# Altium PCB power_pcb.PcbDoc
Units mil, origin at the board's own origin, x right, y up, seen from the top; angles counter-clockwise.
Board outline 6000 x 4000 mil, 2 copper layers (Top Layer, Bottom Layer); 63 components, 42 nets, 184 pads, 0 vias.
Unrouted connection lines stored in the file: 132.
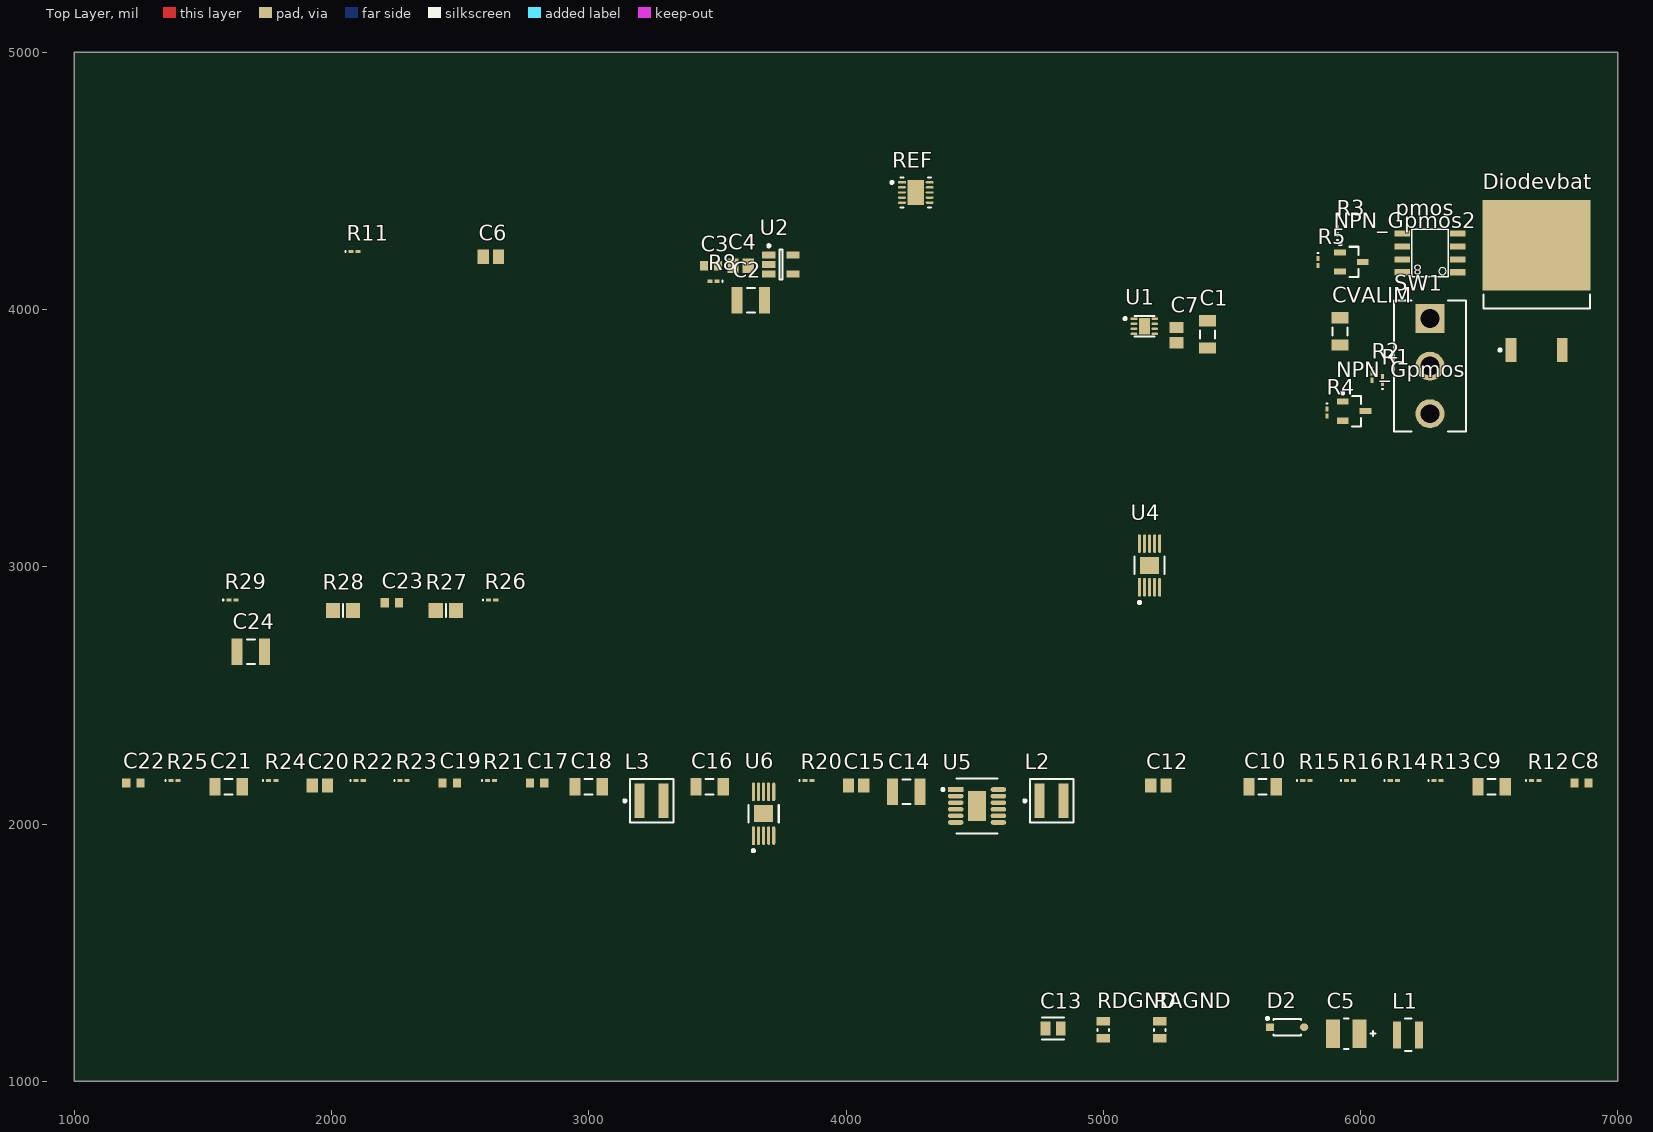
[diagram p0: Top Layer view]
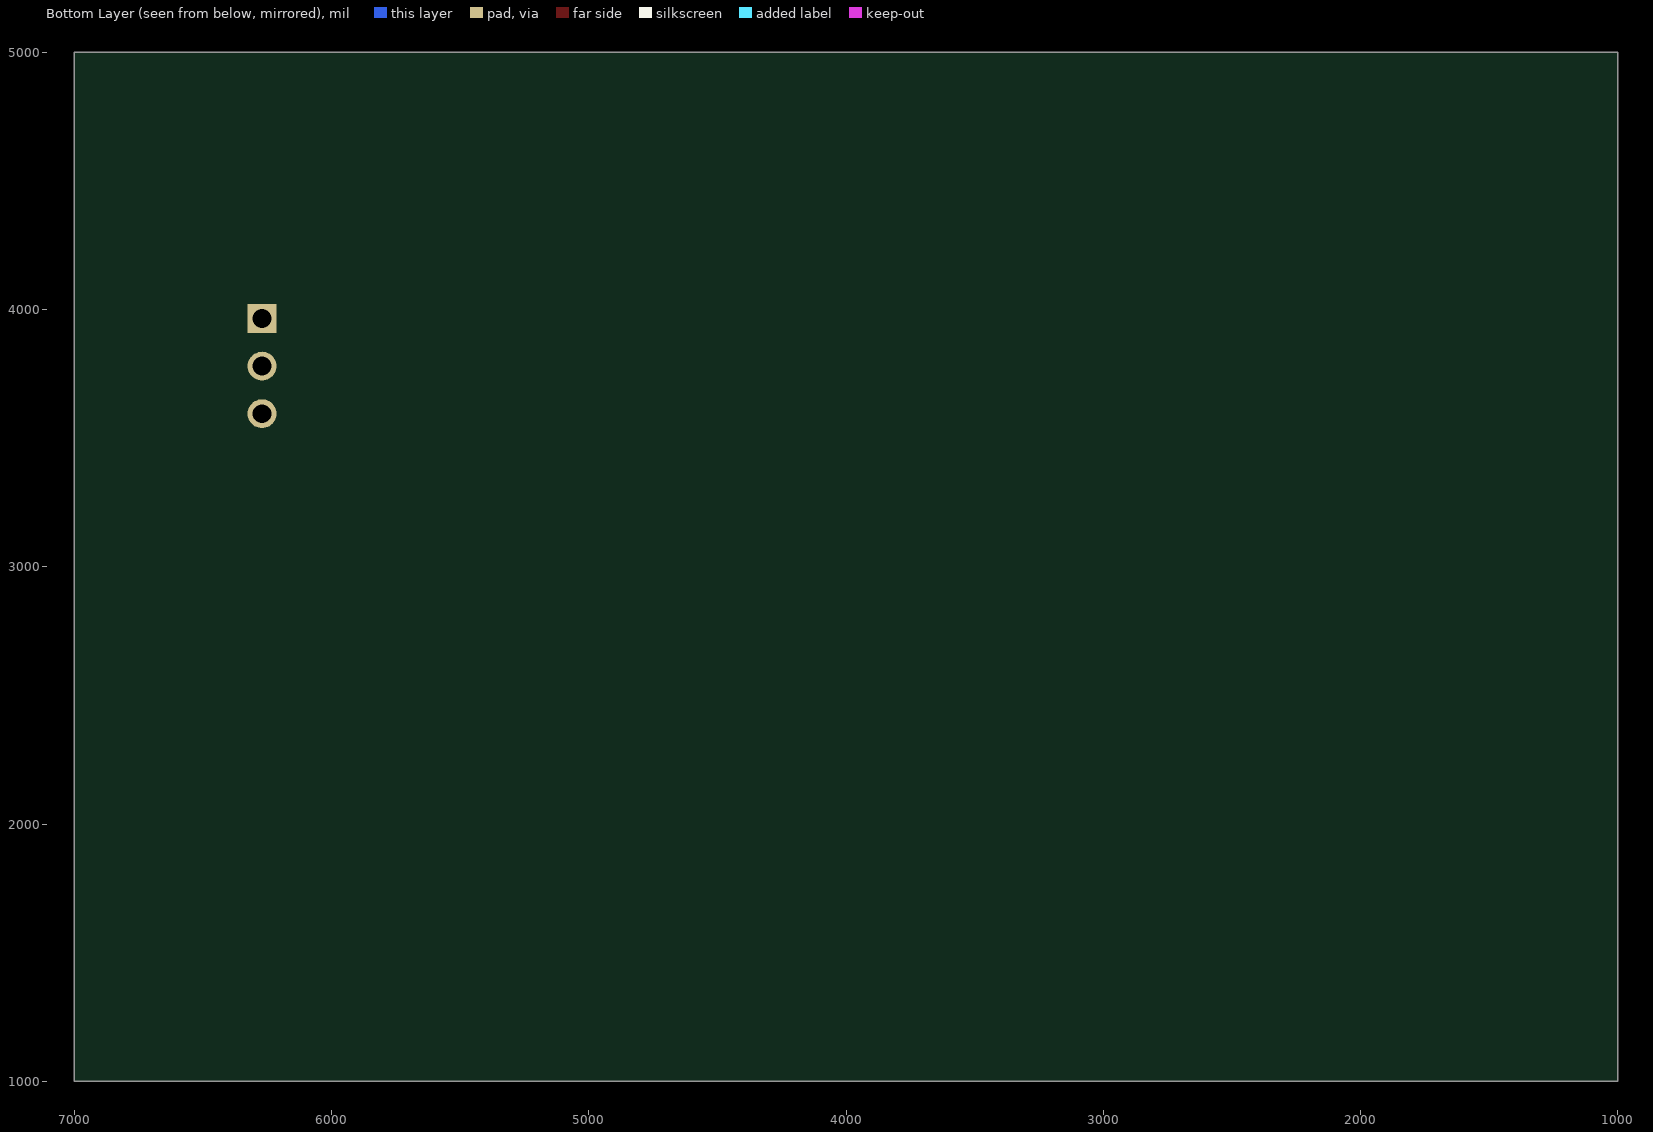
[diagram p1: Bottom Layer view, seen from below]

## Layer stack, top to bottom
Top Solder: solder mask 0.4, Solder Resist, Dk 3.5
Top Layer: signal copper 1.4
Dielectric 1: dielectric 12.6, FR-4, Dk 4.8
Bottom Layer: signal copper 1.4
Bottom Solder: solder mask 0.4, Solder Resist, Dk 3.5

## Board outline
1000,1000 7000,1000 7000,5000 1000,5000

## Design rules (kind name [scope] priority, off if disabled: settings)
Clearance [All] p1: gap=10 ignorepadtopadclearanceinfootprint=FALSE except(0: Arc-Hole Track-Hole SMDPad-Hole THPad-Hole Via-Hole Fill-Hole Poly-Hole Region-Hole Text-Hole)
PolygonConnect [All] p1: connectstyle=Relief reliefconductorwidth=10 reliefentries=4 polygonreliefangle="90 Angle" airgapwidth=10
RoutingVias [All] p1: holewidth=28 width=50 viastyle="Through Hole" minholewidth=28 minwidth=50 maxholewidth=28 maxwidth=50
SolderMaskExpansion [All] p1: expansion=4 istentingtop=FALSE
Width [All] p1: maxlimit=50 minlimit=5 preferedwidth=10 minimp=50.000000 maximp=50.000000 favimp=50.000000
30 further rules are at their usual default settings.

## Components (designator, comment, footprint, x,y, rotation, side; value= is the part's Value field where it differs from the comment)
C1 "X7R/25V" C1206 5405,3903.15 r270 top value=4.7µF
C2 "X5R/16V" C1210 3630.06,4036.04 r0 top value=22µF
C3 "X7R/10V" 1608[0603] 3475,4170 r0 top value=10nF
C4 "X7R/25V" C0805 3590.47,4170 r0 top value=1µF
C5 "TAJB226K016RNJ" FP-TAJB-MFG 5945,1185 r0 top
C6 "X7R" C0805 2619.5,4205 r0 top value=1µF
C7 "X7R/25V" C0805 5285,3900.47 r90 top value=1µF
C8 "X7R/50V" 1608[0603] 6859.5,2160 r0 top value=1200pF
C9 "X7R/25V" C1206 6509.5,2145 r0 top value=4.7µF
C10 "X7R/25V" C1206 5619.5,2145 r0 top value=4.7µF
C12 "X7R/50V" C0805 5214.5,2150 r0 top value=0.22µF
C13 "C0805C103K2RACTU" FP-C0805C-DN-MFG 4805,1205 r0 top value="10,000 pF"
C14 "X7R/10V" C1210 4234.5,2125 r0 top value=47µF
C15 "X7R/50V" C0805 4039.5,2150 r0 top value=100nF
C16 "X7R/25V" C1206 3469.5,2145 r0 top value=4.7µF
C17 "X7R/10V" 1608[0603] 2799.5,2160 r0 top value=1µF
C18 "X7R/16V" C1206 2999.5,2145 r0 top value=10µF
C19 "X7R/10V" 1608[0603] 2459.5,2160 r0 top value=10nF
C20 "Cap Semi" C0805 1954.5,2150 r0 top value=10pF
C21 "X7R/25V" C1206 1599.5,2145 r0 top value=4.7µF
C22 "X7R/10V" 1608[0603] 1229.5,2160 r0 top value=1µF
C23 "X7R/10V" 1608[0603] 2234.5,2860 r0 top value=10nF
C24 "X7R / 6.3V" C1210 1686.35,2670 r0 top value=22µF
CVALIM "X7R/25V" C1206 5920,3915 r270 top value=4.7µF
D2 "MBR0520LT1G" FP-425-04-IPC_C 5715,1210 r0 top
Diodevbat "SM74611" D2PAK_N 6685,4110.24 r90 top
L1 "LQH3NPN220MJRL" FP-LQH3NPN_JR-MFG 6185,1180 r0 top
L2 "XFL4020-222MEC" FP-XFL4020-MFG 4799.5,2090 r0 top
L3 "XFL4020-222MEC" FP-XFL4020-MFG 3244.5,2090 r0 top
NPN_Gpmos "MMBT3904" SOT-23_N 5975,3605 r0 top
NPN_Gpmos2 "MMBT3904" SOT-23_N 5965,4185 r0 top
pmos "FDS6681Z" SO-8 6270,4195 r180 top
R1 "Res CMS" 0603 6085,3726.22 r90 top value=1M
R2 "Res CMS" 0603 6045,3738.78 r270 top value=100K
R3 "Res CMS" 0603 5910,4305 r90 top value=100K
R4 "Res CMS" 0603 5870,3600 r270 top value=1M
R5 "Res CMS" 0603 5835,4185 r270 top value=1M
R8 "" 0603 3485,4110 r180 top value=360K/1%
R11 "" 0603 2089.5,4225 r0 top value=1K8/1%
R12 "" 0603 6679.5,2170 r0 top value=75K/1%
R13 "" 0603 6299.5,2170 r0 top value=40K2/1%
R14 "Res CMS" 0603 6129.5,2170 r0 top value=1K
R15 "" 0603 5789.5,2170 r0 top value=10K/1%
R16 "" 0603 5959.5,2170 r0 top value=37K4/1%
R20 "" 0603 3854.5,2170 r0 top value=140K
R21 "" 0603 2619.5,2170 r0 top value=2K2
R22 "" 0603 2109.5,2170 r0 top value=40K2
R23 "" 0603 2279.5,2170 r0 top value=7K5
R24 "" 0603 1769.5,2170 r0 top value=49K9/1%
R25 "" 0603 1389.5,2170 r0 top value=330
R26 "" 0603 2624.5,2870 r0 top value=100/1%
R27 "Res1" 6-0805_M 2444.5,2830 r0 top value=1M/1%
R28 "Res1" 6-0805_M 2044.5,2830 r0 top value=309k/1%
R29 "" 0603 1614.5,2870 r0 top value=40K2
RAGND "CRCW08050000Z0EA" RESC2013X50X30LL20T20 5220,1200 r90 top
RDGND "CRCW08050000Z0EA" RESC2013X50X30LL20T20 5000,1200 r90 top
REF "LT3042HDD#TRPBF" FP-DD-10-05-08-1699-IPC_C 4271.24,4455 r0 top
SW1 "A101SYCB04" FP-A101SYCB04-MFG 6270,3780 r0 top
U1 "ADP7183ACPZN-R7" FP-CP-8-27-IPC_B 5160,3935 r0 top
U2 "LT1611CS5" LT-S5-5-SOT-23_M 3747.24,4175 r0 top
U4 "LT8608HMSE#PBF" FP-MSE-10-05-08-1664-IPC_A 5180,3005 r90 top
U5 "LT3045EMSE#TRPBF" FP-MSE-12-05-08-1666-IPC_B 4509.5,2070 r0 top
U6 "LT8608HMSE#PBF" FP-MSE-10-05-08-1664-IPC_A 3679.5,2040 r90 top

## Footprints (in the part's own frame and the unit in brackets; to place one, negate y for a bottom-side part, rotate by r counter-clockwise, add the part's x,y. Pads: shape width x height; smd on the part's side, far side on the other; paste and mask are expansions set on the pad)
6-0805_M [mm] "Chip Resistor, Body 2.0x1.2mm, IPC Low Density"
  rect 1.4x1.5 smd: 1(-1,0) 2(1,0)
  silkscreen extent 0,-0.65 0,0.65, body extent -1.07,-0.7 1.07,0.7, height 0.7
0603 [mm] "Chip Inductor, Body 0.6x0.3mm, IPC High Density"
  rect 0.5x0.3 smd: 1(-0.35,0) 2(0.35,0)
  silkscreen extent -0.9,-0.05 -0.9,0.05, body extent -0.33,-0.18 0.33,0.18, height 0.55
1608[0603] [mm] "Chip Capacitor, Body 1.6x0.8mm, IPC High Density"
  rect 0.8x0.9 smd: 1(-0.7,0) 2(0.7,0)
  body extent -0.87,-0.48 0.87,0.48, height 1.3
C0805 [mm] "Chip Capacitor, Body 2.0x1.3mm, IPC High Density"
  rect 1.1x1.4 smd: 1(-0.75,0) 2(0.75,0)
  body extent -1.1,-0.72 1.1,0.72, height 1.4
C1206 [mm] "Chip Capacitor, Body 3.2x1.6mm, IPC High Density"
  rect 1.1x1.7 smd: 1(-1.35,0) 2(1.35,0)
  silkscreen extent -0.4,-0.75 0.4,0.75, body extent -1.7,-0.9 1.7,0.9, height 1.3
C1210 [mm] "Chip Capacitor, Body 3.2x2.5mm, IPC High Density"
  rect 1.1x2.6 smd: 1(-1.35,0) 2(1.35,0)
  silkscreen extent -0.4,-1.2 0.4,1.2, body extent -1.7,-1.35 1.7,1.35, height 1.3
D2PAK_N [mm] "D2-PAK, 4-Leads, Body 8.8x10.4mm, Pitch 2.54mm, Lead Span 15.1mm, IPC Medium Density"
  rect 2.4x1.05 smd: 1(-6.8,2.54) 3(-6.8,-2.54)
  rect 8.9x10.65 smd: 2(3.55,0)
  silkscreen extent -6.92,-5.25 -1.3,5.25, body extent -2.7,-5.28 6.3,5.28, height 4.69
FP-425-04-IPC_C [mm]
  rect 0.808x0.742 smd paste+0 mask+0: 1(-1.68,0)
  rrect100% 0.808x0.742 smd paste+0 mask+0: 2(1.68,0)
  silkscreen extent -2.07,-0.8 1.35,1, body extent -2.18,-0.9 2.18,0.9, height 0.25
FP-A101SYCB04-MFG [mil]
  rect 112.37x112.37 hole 73 paste-39370.1 mask+0: 1(0,185)
  round 112.37 hole 73 paste-39370.1 mask+0: 2(0,0) 3(0,-185)
  silkscreen extent -140,-255 140,255, body extent -144,-259 144,259, height 10
FP-C0805C-DN-MFG [mm]
  rect 0.95x1.35 smd paste+0 mask+0: 1(-0.75,0) 2(0.75,0)
  silkscreen extent -1.1,-1.07 1.1,1.07, body extent -1.4,-0.85 1.4,0.85, height 0.25
FP-CP-8-27-IPC_B [mm]
  rect 0.656x0.242 smd paste+0 mask+0: 1(-1.028,0.75)
  rrect100% 0.656x0.242 smd paste+0 mask+0: 2(-1.028,0.25) 3(-1.028,-0.25) 4(-1.028,-0.75) 5(1.028,-0.75) 6(1.028,-0.25) 7(1.028,0.25) 8(1.028,0.75)
  rect 1.1x1.6 smd paste-1000 mask+0: 9(0,0)
  silkscreen extent -2.03,-1 1,1, body extent -1.61,-1.25 1.61,1.25, height 0.25
FP-DD-10-05-08-1699-IPC_C [mm]
  rect 0.781x0.242 smd paste+0 mask+0: 1(-1.366,1)
  rrect100% 0.781x0.242 smd paste+0 mask+0: 2(-1.366,0.5) 3(-1.366,0) 4(-1.366,-0.5) 5(-1.366,-1) 6(1.366,-1) 7(1.366,-0.5) 8(1.366,0) 9(1.366,0.5) 10(1.366,1)
  rect 1.65x2.48 smd paste-1000 mask+0: 11(0,0)
  silkscreen extent -2.48,-1.5 1.5,1.5, body extent -1.86,-1.6 1.86,1.6, height 0.25
FP-LQH3NPN_JR-MFG [mm]
  rect 0.8x2.7 smd paste+0 mask+0: 1(-1.1,0) 2(1.1,0)
  silkscreen extent -0.33,-1.6 0.33,1.6, body extent -1.7,-1.7 1.7,1.7, height 0.25
FP-MSE-10-05-08-1664-IPC_A [mm]
  rect 1.84x0.312 smd paste+0 mask+0: 1(-2.16,1)
  rrect100% 1.84x0.312 smd paste+0 mask+0: 2(-2.16,0.5) 3(-2.16,0) 4(-2.16,-0.5) 5(-2.16,-1) 6(2.16,-1) 7(2.16,-0.5) 8(2.16,0) 9(2.16,0.5) 10(2.16,1)
  rect 1.68x1.88 smd paste-1000 mask+0: 11(0,0)
  silkscreen extent -3.77,-1.5 0.86,1.5, body extent -3.58,-2 3.58,2, height 0.25
FP-MSE-12-05-08-1666-IPC_B [mm]
  rect 1.54x0.455 smd paste+0 mask+0: 1(-2.11,1.625)
  rrect100% 1.54x0.455 smd paste+0 mask+0: 2(-2.11,0.975) 3(-2.11,0.325) 4(-2.11,-0.325) 5(-2.11,-0.975) 6(-2.11,-1.625) 7(2.11,-1.625) 8(2.11,-0.975) 9(2.11,-0.325) 10(2.11,0.325) 11(2.11,0.975) 12(2.11,1.625)
  rect 1.753x2.947 smd paste-1000 mask+0: 13(0,0)
  silkscreen extent -3.5,-2.7 2.02,2.7, body extent -3.13,-2.27 3.13,2.27, height 0.25
FP-TAJB-MFG [mm]
  rect 1.4x2.8 smd paste+0 mask+0: 1(-1.3,0) 2(1.3,0)
  silkscreen extent -0.23,-1.5 2.9,1.5, body extent -2.1,-1.6 2.1,1.6, height 0.25
FP-XFL4020-MFG [mm]
  rect 0.98x3.4 smd paste+0 mask+0: 1(-1.185,0) 2(1.185,0)
  silkscreen extent -2.77,-2.15 2.15,2.15, body extent -2.25,-2.25 2.25,2.25, height 0.25
LT-S5-5-SOT-23_M [mm] "SOT23, 5-Leads, Body 3x1.75mm, Pitch 0.95mm, IPC Low Density"
  rect 1.3x0.7 smd: 1(-1.2,0.95) 2(-1.2,0) 3(-1.2,-0.95) 4(1.2,-0.95) 5(1.2,0.95)
  silkscreen extent -1.32,-1.5 0.15,1.97, body extent -0.87,-1.5 0.87,1.5, height 1.45
RESC2013X50X30LL20T20 [mm] "Chip Resistor, 2-Leads, Body 2.00x1.25mm, IPC High Density"
  rect 0.85x1.35 smd: 1(-0.825,0) 2(0.825,0)
  silkscreen extent -0.1,-0.58 0.1,0.58, body extent -1.1,-0.72 1.1,0.72, height 0.5
SO-8 [mil]
  rect 60x24 smd: 1(-108,50) 2(-108,0) 3(-108,-50) 4(-108,-100) 5(108,-100) 6(108,-50) 7(108,0) 8(108,50)
  silkscreen extent -71,-118 71,68
SOT-23_N [mm] "SOT23, 3-Leads, Body 2.9x1.3mm, Pitch 0.95mm, Lead Span 2.5mm, IPC Medium Density"
  rect 1.15x0.6 smd: 1(-1.125,0.95) 2(-1.125,-0.95) 3(1.125,0)
  silkscreen extent -1.25,-1.5 0.7,1.92, body extent -0.7,-1.5 0.7,1.5, height 1.1

## Part data
C1 C2 C3 C4 C6 C7 C8 C9 C10 C12 C14 C15 C16 C17 C18 C19 C21 C22 C23 C24 CVALIM: library part "Cap Semi", "Capacitor (Semiconductor SIM Model)", LatestRevisionDate=29-May-2009, LatestRevisionNote="IPC-7351 Footprint Added.", PackageDescription="Chip Capacitor", PackageReference=C1206, Published=8-Jun-2000, Publisher="Altium Limited"
C5: library part CMP-2100-03689-2, "22uF 16V  ±10% 2.3Ω 1210  SMD Tantalum Capacitor", Capacitance=22uF, Case Code (Imperial)=1210, Case Code (Metric)=3528, Dielectric Material=Tantalum, ESR (Equivalent Series Resistance)=2.3R, Leakage Current=3.5uA, Max Operating Temperature=125°C, Min Operating Temperature=-55°C, Package Quantity=1, Tolerance=10%, Voltage=16V, Case/Package=1210, Construction=Flat, Depth=2.8mm, Dissipation Factor=6%, Features="General Purpose", Height=1.9mm, Height - Seated (Max)=0.083inch, Lead Free="Lead Free", Length=3.5mm, Mount="Surface Mount", Number of Pins=2, Packaging="Tape and Reel", Polarity=Polar, Radiation Hardening=No, REACH SVHC="No SVHC", RoHS Compliant=Yes, Series=TAJ, Termination=SMD/SMT, Voltage Rating=16V, Voltage Rating (DC)=16V, Width=2.8mm
C13: library part CMP-2007-00259-2, "CAP CER 10000PF 200V X7R 0805", Capacitance="10,000 pF", Manufacturer=KEMET, Package=C0805C-DN, Temperature="-55°C to +125°C", Temperature Characteristic=X7R, Temperature Coefficient=30ppm/°C, Temperature Range High=+125°C, Temperature Range Low=-55°C, Tolerance=0.1, Voltage Rating="200 V", Automotive=No, Category=Cap, ComponentLink2Description=Datasheet, ComponentLink2URL=https://content.kemet.com/datasheets/KEM_C1003_C0G_SMD.pdf, Device Class L1="Passive Components", Device Class L2=Capacitors, Device Class L3="Ceramic Capacitors", Digikey Description="CAP CER 10000PF 200V X7R 0805", Height=0.88mm, Ipc Land Pattern Name=CAPC200125X78, Lead Free=Yes, Manufacturer Part Number=C0805C103K2RACTU, Material=Ceramic, Mouser Description="KEMET - C0805C103K2RACTU - CAP, MLCC, X7R, 10NF, 200V, 0805", Octopart=https://octopart.com/c0805c103k2ractu-kemet-9138347, RoHS=TRUE
C20: "Capacitor (Semiconductor SIM Model)", LatestRevisionDate=29-May-2009, LatestRevisionNote="IPC-7351 Footprint Added.", PackageDescription="Chip Capacitor", PackageReference=C1206, Published=8-Jun-2000, Publisher="Altium Limited"
D2: library part CMP-1055-00425-2, "DIODE SCHOTTKY 20V 500MA SOD123", Average Rectified Current=500mA, Case/Package=SOD-123-2, Forward Voltage=385mV, Max Forward Surge Current (Ifsm)=5.5A, Max Operating Temperature=125°C, Max Repetitive Reverse Voltage (Vrrm)=20V, Max Reverse Leakage Current=250uA, Min Operating Temperature=-65°C, Package Quantity=3000, Contact Plating=Tin, Current Rating=500mA, Element Configuration=Single, Forward Current=500mA, Height=1.12mm, Lead Free="Lead Free", Length=2.69mm, Max Reverse Voltage (DC)=20V, Max Surge Current=5.5A, Number of Pins=2, Output Current=500mA, Packaging="Tape and Reel", Peak Non-Repetitive Surge Current=5.5A, Peak Reverse Current=250uA, Polarity=Standard, Radiation Hardening=No, REACH SVHC="No SVHC", Termination=SMD/SMT, Voltage Rating (DC)=20V, Width=1.6mm
Diodevbat: "Smart Schottky"
L1: library part CMP-06042-011801-1, "Wire Wound Ferrite Inductor for Power Lines 22μH ±20% 0.6Ω 800mA 1212", Case Code (Imperial)=1212, Case Code (Metric)=3030, Current Rating=350mA, DC Resistance (DCR)=600mR, Inductance=22uH, Max DC Current=520mA, Max Operating Temperature=105°C, Min Operating Temperature=-40°C, Package Quantity=2000, Resistor Type=Wirewound, Self Resonant Frequency=20MHz, Test Frequency=1MHz, Tolerance=20%, Case/Package=1212, Core Material=Ferrite, Height=0.9mm, Height - Seated (Max)=0.047inch, Length=0.118inch, Mount="Surface Mount", Packaging="Tape and Reel", Saturation Current=520mA, Shielding=Shielded, Termination=SMD/SMT, Weight=0.001799oz, Width=0.118inch
L2 L3: library part CMP-2000-05090-4, "INDUCTOR, 2.2UH, 8A, 20%, 38MHZ, REEL", Case/Package=SMD/SMT, DC Resistance (DCR)=23.5mR, Inductance=2.2uH, Inductance Tolerance=20%, Max DC Current=8A, Max Operating Temperature=125°C, Min Operating Temperature=-40°C, Saturation Current=3.1A, Self Resonant Frequency=38MHz, Test Frequency=100kHz, Core Material=Composite, Height=2.1mm, Lead Free="Contains Lead", Length=4.3mm, Mount="Surface Mount", Packaging="Tape and Reel", REACH SVHC="No SVHC", RMS Current (Irms)=8A, RoHS Compliant=Yes, Series=XFL4020, Shielding=Shielded, Termination=SMD/SMT, Tolerance=20%, Width=4.3mm
NPN_Gpmos NPN_Gpmos2: "NPN"
pmos: "P-Channel 30V 20A _Ta_ 2.5W _Ta_ Surface Mount 8-SOIC", Package="SO-8 ON Semiconductor", Availability=Unavailable, MF="ON Semiconductor", MP=FDS6681Z, Price=None, SnapEDA_Link=https://www.snapeda.com/parts/FDS6681Z/ON%20Semiconductor/view-part/1803759/?ref=snap
R1 R2 R3 R4 R5 R14 R27 R28: "Resistor", LatestRevisionDate=17-Jul-2002, LatestRevisionNote="Re-released for DXP Platform.", PackageDescription="Axial Device, Thru-Hole; 2 Leads; 0.3 in Pin Spacing", PackageReference=AXIAL-0.3, Published=8-Jun-2000, Publisher="Altium Limited"
R8 R11 R12 R13 R15 R16 R20 R21 R22 R23 R24 R25 R26 R29: library part "Res CMS", "Resistor", LatestRevisionDate=17-Jul-2002, LatestRevisionNote="Re-released for DXP Platform.", PackageDescription="Axial Device, Thru-Hole; 2 Leads; 0.3 in Pin Spacing", PackageReference=AXIAL-0.3, Published=8-Jun-2000, Publisher="Altium Limited"
RAGND RDGND: library part CMP-2001-04896-1, Manufacturer="Vishay Dale", Part Number=CRCW08050000Z0EA
REF: library part CMP-09138-000070-1, "IC REG LIN POS ADJ 200MA 10DFN", Case/Package=DFN, Dropout Voltage=350mV, Max Operating Temperature=150°C, Min Current Limit=220mA, Min Operating Temperature=-40°C, Output Current=200mA, Output Voltage=15V, Mount="Surface Mount", Number of Pins=10, Number of Regulators=1, Packaging="Tape and Reel", RoHS Compliant=Yes
SW1: library part CMP-03408-000017-1, "SWITCH TOGGLE SPDT 0.4VA 20V", Actuator Color=Chrome, Contact Current Rating=400mA, Contact Resistance=10mR, Flammability Rating="UL94 V-1", Insulation Resistance=30MR, Max Operating Temperature=85°C, Max Voltage Rating (AC)=20V, Min Operating Temperature=-30°C, Package Quantity=100, Power Rating=400mW, Actuator Length=10.41mm, Actuator Material=Phenolic, Actuator Type="Standard Round", Contact Material=Copper, Contact Plating=Gold, Depth=6.86mm, Electrical Life=6000Cycles, ELV=Compliant, Illumination Type=Non-Illuminated, Lead Free="Lead Free", Max Voltage Rating (DC)=20V, Mount=Panel, Number of Poles=1, Number of Positions=2, Orientation=Straight, Packaging=Bulk, Radiation Hardening=No, REACH SVHC="No SVHC", RoHS Compliant=Yes, Series="Gemini A", Switch Function=On-On, Termination="PC Pins", Throw Configuration=SPDT, Voltage Rating (AC)=20V, Voltage Rating (DC)=20V
U1: library part CMP-09138-000168-1, "IC REG LIN NEG ADJ 300MA 8LFCSP", Dropout Voltage=220mV, Max Input Voltage=-5.5V, Max Operating Temperature=125°C, Max Output Voltage=-5V, Max Supply Current=7mA, Min Operating Temperature=-40°C, Min Output Voltage=-500mV, Output Current=300mA, Power Supply Rejection Ratio (PSRR)=40dB, Quiescent Current=900uA, Lead Free="Contains Lead", Mount="Surface Mount", Number of Pins=8, Number of Regulators=1, Output Configuration=Negative, Output Type=Adjustable, Packaging="Cut Tape", RoHS Compliant=Yes
U2: library part CMP-0491-01517-1, "Inverting 1.4 MHz Switching Regulator, 5-pin SOT23 (S5-5), 0 to 70 degC", Manufacturer="Linear Technology", ComponentLink1Description="Manufacturer URL", ComponentLink1URL=http://www.linear.com/, ComponentLink2Description=Datasheet, ComponentLink2URL=http://cds.linear.com/docs/en/datasheet/1611f.pdf, ComponentLink3Description="Package Specification", ComponentLink3URL=http://cds.linear.com/docs/en/datasheet/17278fb.pdf, Mounting Technology="Surface Mount", Number of Outputs=1, PackageDescription="5-Pin Plastic SOT-23, Body 1.625 x 2.90 mm, Pitch 0.95 mm", PackageReference=S5-5, PackageVersion=Aug-07, PartNumber=LT1611CS5, RoHS=FALSE
U4 U6: library part CMP-09139-000131-1, "IC REG BUCK ADJ 1.5A 10MSOP", Number of Pins=10, RoHS Compliant=Yes
U5: library part CMP-09138-000053-1, "IC REG LINEAR 0V 500MA 12MSOP", Case/Package=MSOP, RoHS Compliant=Yes

## Nets (pads, with @x,y where several pads share a name; then routed paths per layer and width w, separated by ;. In a path a pad name is that pad's centre, name@x,y a point inside that pad or via, vN(x,y) a via of type N, cw(c..) or ccw(c..) an arc to the next point about the centre after c; other vN are vias at no path point)
+VALIM: C13.1 C16.2 CVALIM.1 pmos.8 REF.4 U4.9 U4.10 U6.9 U6.10
+VBAT: Diodevbat.1 Diodevbat.3
-VBAT: NPN_Gpmos.2 R4.2 RAGND.2 RDGND.2 SW1.3
A+5V: C18.1 U5.10 U5.11 U5.12
A-5V: C1.1 U1.1 U1.2
AGND: C1.2 C2.2 C4.1 C5.1 C7.1 C9.1 C9.2 C10.2 C13.2 C14.2 C17.1 C18.2 C19.1 C21.1 CVALIM.2 D2.2 R12.1 R12.2 R13.2 R14.2 R15.1 R22.2 R23.2 R25.2 R26.2 RAGND.1 REF.7 U1.6 U2.2 U4.5 U5.9 U5.13
D3V3: C20.2 C24.1 L3.2 R27.1
DGND: C16.1 C22.1 C23.1 C24.2 NPN_Gpmos2.2 R5.2 R28.1 R29.2 U6.5
GND: REF.8 REF.11
NetC2_1: C2.1 C6.1 C8.1 D2.1 L1.2 R16.2
NetC3_1: C3.1 R11.2 R13.1 U1.4
NetC3_2: C3.2 C4.2 R8.1 U1.3
NetC5_2: C5.2 C6.2 C14.1 L1.1 L2.2 R20.1 U2.1 U2.4 U2.5 U5.1 U5.2 U5.4 U5.7
NetC7_2: C7.2 U1.7
NetC8_2: C8.2 R15.2 R16.1 U2.3
NetC12_1: C12.1 U4.1
NetC12_2: C12.2 L2.1 U4.2
NetC15_1: C15.1 U6.1
NetC15_2: C15.2 L3.1 U6.2
NetC17_2: C17.2 U4.3
NetC19_2: C19.2 U4.7
NetC20_1: C20.1 R27.2 R28.2 U6.11
NetC21_2: C21.2 R24.1 U5.8
NetC22_2: C22.2 U6.3
NetC23_2: C23.2 U6.7
NetDiodevbat_2: Diodevbat.2 pmos.3 R1.1 SW1.1
NetNPN_Gpmos2_1: NPN_Gpmos2.1 R3.1 R5.1
NetNPN_Gpmos2_3: NPN_Gpmos2.3 NPN_Gpmos.3 pmos.4 R1.2
NetNPN_Gpmos_1: NPN_Gpmos.1 R2.2 R4.1
NetR8_2: R8.2 R11.1
NetR14_1: R14.1 REF.5
NetR20_2: R20.2 R21.2 U5.3
NetR21_1: R21.1 R23.1 U4.6 U4.11
NetR22_1: R22.1 U4.4
NetR24_2: R24.2 R26.1
NetR25_1: R25.1 U5.6
NetR29_1: R29.1 U6.4
NetREF_1: REF.1 REF.2 REF.3 REF.6
NetU1_5: U1.5 U1.8 U1.9
PWR_ON: R3.2
REFALIM: C10.1 REF.9 REF.10
SW_PWR: R2.1 SW1.2
pads on no net: pmos.1 pmos.2 pmos.5 pmos.6 pmos.7 RDGND.1 U4.8 U5.5 U6.6 U6.8

## Text inside footprints (layer, text, board x,y; h text height)
pmos: Top Overlay "8" at 6239.95,4174.97 h40.07 r180